# Altium PCB drin.PcbDoc
Units mm, origin at the board's own origin, x right, y up, seen from the top; angles counter-clockwise.
Board outline 36.09 x 67.31 mm, 2 copper layers (Top Layer, Bottom Layer); 39 components, 17 nets, 76 pads, 0 vias.
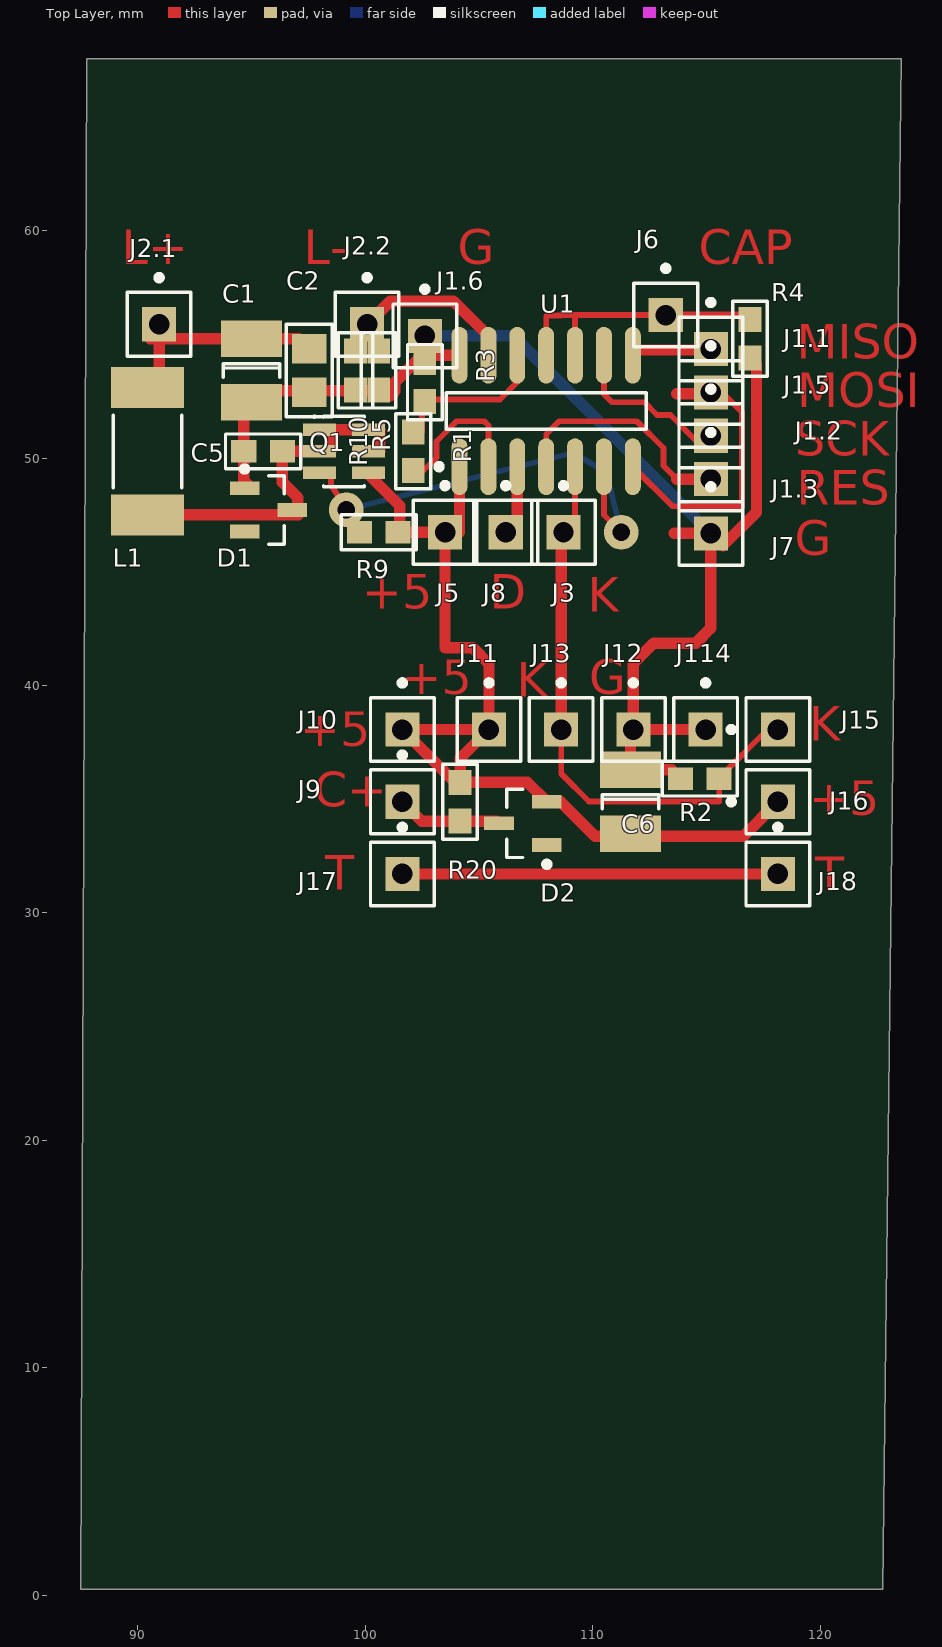
[diagram p0: Top Layer view]
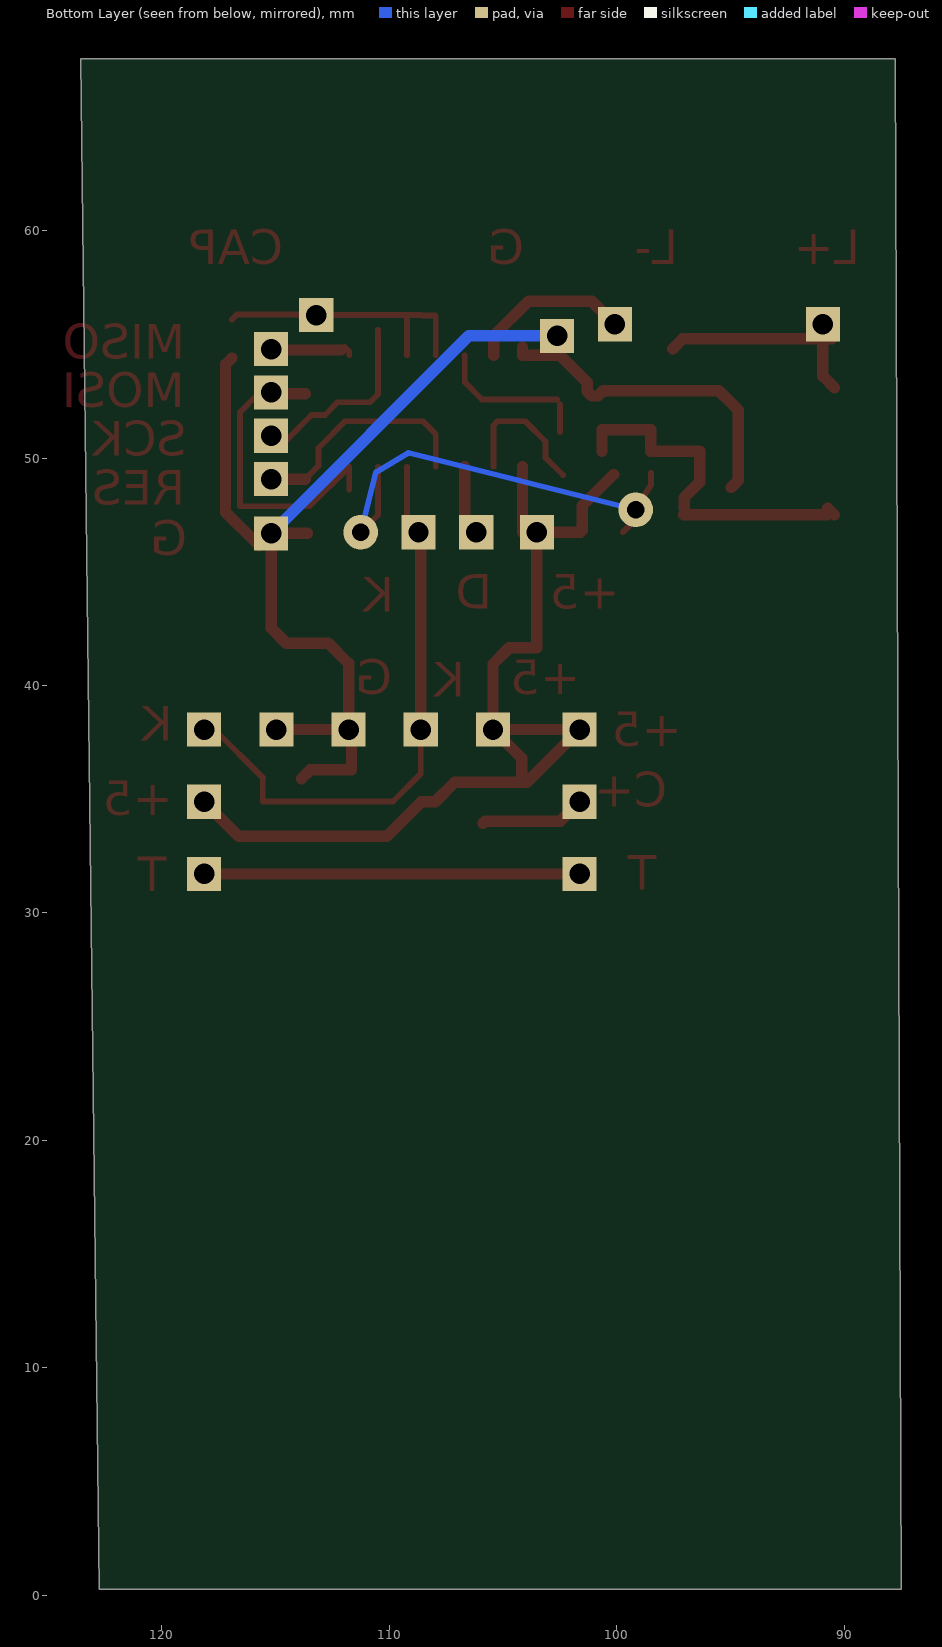
[diagram p1: Bottom Layer view, seen from below]

## Layer stack, top to bottom
Top Layer: signal copper 0.0356
Dielectric: dielectric 0.32, FR-4, Dk 4.8
Bottom Layer: signal copper 0.0356

## Board outline
87.478,0.254 87.757,67.564 123.571,67.564 122.758,0.254

## Design rules (kind name [scope] priority, off if disabled: settings)
Clearance [All] p1: gap=0.254
PolygonConnect [All] p1: connectstyle=Relief reliefconductorwidth=0.254 reliefentries=4 polygonreliefangle="90 Angle"
RoomDefinition drin [InComponentClass('drin')] p1: confinementstyle=ConfineIn formatcopy=TRUE lockcomponents=FALSE outline 13.716,89.916 27.432,89.916 27.432,103.124 13.716,103.124
RoutingVias [All] p1: holewidth=0.711 width=1.27 viastyle="Through Hole" minholewidth=0.711 minwidth=1.27 maxholewidth=0.711 maxwidth=1.27
SilkscreenOverComponentPads [All] p1: minsilkscreentomaskgap=0.254
SolderMaskExpansion [All] p1: expansion=0.102
TestPointUsage [All] p1: valid=0 allowmultiple=FALSE
Testpoint [All] p1: side=15 testpointundercomponent=TRUE minsize=1.016 maxsize=2.54 preferedsize=1.524 minholesize=0 maxholesize=1.016 preferedholesize=0.813 testpointgrid=0.025 style=1023 order=0123456789
Width [All] p1: maxlimit=2 minlimit=0.254 preferedwidth=0.5
23 further rules are at their usual default settings.

## Components (designator, comment, footprint, x,y, rotation, side; value= is the part's Value field where it differs from the comment)
C1 "100uF" C1210 94.996,53.848 r270 top
C2 "100pF" 2012[0805]A 97.536,53.848 r270 top
C5 "100pF" 1608[0603]A 95.504,50.292 r0 top
C6 "100uF" C1210 111.658,34.888 r270 top
D1 "BAT54C" SOT23_N 95.741,47.716 r0 top
D2 "BAT54C" SOT23_N 106.925,33.938 r180 top
J1.1 "MISO" PIN1 115.189,54.788 r0 top
J1.2 "SCK" PIN1 115.189,50.978 r0 top
J1.3 "RESET" PIN1 115.189,49.073 r0 top
J1.5 "MOSI" PIN1 115.189,52.883 r0 top
J1.6 "CND" PIN1 102.616,55.372 r0 top
J2.1 "LED+" PIN1 90.932,55.88 r0 top
J2.2 "LED-" PIN1 100.076,55.88 r0 top
J3 "KEY" PIN1 108.712,46.736 r0 top
J5 "+5" PIN1 103.505,46.736 r0 top
J6 "test_cap" PIN1 113.208,56.286 r0 top
J7 "CND" PIN1 115.189,46.685 r0 top
J8 "DEBUG" PIN1 106.172,46.736 r0 top
J9 "C+" PIN1 101.625,34.888 r0 top
J10 "+5" PIN1 101.625,38.063 r0 top
J11 "+5" PIN1 105.435,38.063 r0 top
J12 "CND" PIN1 111.785,38.063 r0 top
J13 "KEY" PIN1 108.61,38.063 r0 top
J15 "KEY" PIN1 118.135,38.063 r90 top
J16 "+5" PIN1 118.135,34.888 r90 top
J17 "trans" PIN1 101.625,31.713 r0 top
J18 "trans" PIN1 118.135,31.713 r0 top
J114 "CND" PIN1 114.96,38.063 r0 top
L1 "Inductor" 6332[2512] 90.424,50.292 r270 top
Q1 "IRLMS6702" Micro6 99.06,50.292 r270 top
R1 "18K" 1608[0603]A 102.108,50.292 r270 top
R2 "10K" 1608[0603]A 114.706,35.904 r0 top
R3 "1K8" 1608[0603]A 102.616,53.34 r270 top
R4 "10M" 1608[0603]A 116.916,55.245 r90 top
R5 "1" 1608[0603]A 100.584,53.848 r90 top
R9 "10K" 1608[0603]A 100.584,46.736 r180 top
R10 "1" 1608[0603]A 99.568,53.848 r90 top
R20 "1K" 1608[0603]A 104.165,34.888 r90 top
U1 "ATtiny24" SOIC14_M 107.95,52.07 r90 top

## Footprints (in the part's own frame and the unit in brackets; to place one, negate y for a bottom-side part, rotate by r counter-clockwise, add the part's x,y. Pads: shape width x height; smd on the part's side, far side on the other; paste and mask are expansions set on the pad)
1608[0603]A [mm] "Chip Capacitor; Body 1.6 x 0.8 mm (LxW typ)"
  rect 1.1x1 smd: 1(-0.85,0) 2(0.85,0)
  silkscreen extent -1.65,-0.76 1.65,0.76
2012[0805]A [mm] "Chip Resistor; Body 2.0 x 1.3 mm (LxW typ)"
  rect 1.3x1.5 smd: 1(-0.95,0) 2(0.95,0)
  silkscreen extent -2.03,-1.02 2.03,1.02
6332[2512] [mm] "Chip Resistor; Body 6.3 x 3.2 mm (LxW typ)"
  rect 1.8x3.2 smd: 1(-2.8,0) 2(2.8,0)
  silkscreen extent -1.6,-1.5 1.6,1.5
C1210 [mm] "Chip Capacitor; Body 3.2 x 2.5 mm (LxW typ)"
  rect 1.6x2.7 smd: 1(-1.4,0) 2(1.4,0)
  silkscreen extent -0.3,-1.25 0.3,1.25
Micro6 [mm] "SOT-457/SC-74; 6 Leads; Body 3 x 3 mm, inc. leads (LxW max)"
  rect 0.55x1.45 smd: 1(-0.95,-1.075) 2(0,-1.075) 3(0.95,-1.075) 4(0.95,1.075) 5(0,1.075) 6(-0.95,1.075)
  silkscreen extent -1.57,-1.35 1.55,0.9
PIN1 [mm] "Connector; Plug"
  rect 1.5x1.5 hole 0.9: 1(0,0)
  silkscreen extent -1.4,-1.4 1.4,2.17
SOIC14_M [mm] "14-Pin Small Outline Integrated Circuit 1.27 mm Pitch, IPC Low Density"
  oval 2.5x0.7 smd: 1(-2.45,3.81) 2(-2.45,2.54) 3(-2.45,1.27) 4(-2.45,0) 5(-2.45,-1.27) 6(-2.45,-2.54) 7(-2.45,-3.81) 8(2.45,-3.81) 9(2.45,-2.54) 10(2.45,-1.27) 11(2.45,0) 12(2.45,1.27) 13(2.45,2.54) 14(2.45,3.81)
  silkscreen extent -2.57,-4.4 0.8,4.83, body extent -2,-4.38 2,4.38, height 1.75
SOT23_N [mm] "SOT23, 3-Leads, Body 2.9x1.3mm, Pitch 0.95mm, Lead Span 2.3mm, IPC Medium Density"
  rect 1.3x0.6 smd: 1(-1.05,0.95) 2(-1.05,-0.95) 3(1.05,0)
  silkscreen extent -1.17,-1.5 0.7,1.92, body extent -0.7,-1.5 0.7,1.5, height 1.1

## Part data
C1 C2 C5 C6: library part "Cap Semi", "Capacitor (Semiconductor SIM Model)"
D1 D2: "Schottky Barrier Double Diode"
J1.1 J1.2 J1.3 J1.5 J1.6 J2.1 J2.2 J3 J5 J6 J7 J8 J9 J10 J11 J12 J13 J15 J16 J17 J18 J114: library part Socket, "Socket"
Q1: "HEXFET Power MOSFET"
R1 R2 R3 R4 R5 R9 R10 R20: library part "Res Semi", "Semiconductor Resistor"
U1: "8-Bit AVR Microcontroller with 1K Byte of Flash Memory"

## Free pads (board coordinates)
  round 1.524 hole 0.762: 0(111.252,46.736) 1(99.162,47.727)

## Nets (pads, with @x,y where several pads share a name; then routed paths per layer and width w, separated by ;. In a path a pad name is that pad's centre, name@x,y a point inside that pad or via, vN(x,y) a via of type N, cw(c..) or ccw(c..) an arc to the next point about the centre after c; other vN are vias at no path point)
ADC0: J2.2.1 R5.2 R10.2 U1.13 | length 7.2
  Top Layer w0.5: J2.2.1 101.092,56.896 103.872,56.896 105.41,55.358 U1.13
C+: D2.3 J9.1 R20.1 | length 4.6
  Top Layer w0.5: J9.1 102.475,34.038 R20.1 105.775,34.038 D2.3
CAP: J6.1 R4.2 U1.10 U1.11 | length 13.2
  Top Layer w0.254: U1.11 107.95,56.236 107.975,56.261 108.585,56.261 108.61,56.286 109.195,56.286 ; U1.10 109.22,56.261 109.195,56.286 ; J6.1@113.462,55.982 113.487,56.007 J6.1@113.767,56.286 ; 113.97,56.286 J6.1@113.767,56.286 ; R4.2 116.699,56.312 113.792,56.312 J6.1@113.767,56.286 ; 109.195,56.286 J6.1 J6.1@113.767,56.286
DEBUG: J8.1 U1.3 | length 3.5
  Top Layer w0.5: J8.1@106.045,46.355 106.299,46.609 106.68,46.99 U1.3
GND: C1.2 C2.2 C5.1 C6.1 D1.1 J1.6.1 J7.1 J12.1 J114.1 R2.1 R3.1 R4.1 R5.1 R10.1 U1.14 | length 61
  Top Layer w0.5: D1.1@94.962,48.702 94.844,48.82 94.654,49.01 C5.1 94.654,52.106 C1.2 95.507,52.959 97.536,52.959 99.568,52.959 100.584,52.959 100.593,52.959 100.823,52.729 101.092,52.729 101.295,52.932 101.295,52.998 101.295,53.315 102.393,54.413 102.501,54.52 102.616,54.52 U1.14 U1.14@104.14,54.864 ; J12.1@112,37.848 J12.1 ; 113.589,46.685 J7.1 115.189,42.52 114.529,41.859 112.674,41.859 111.785,40.97 J12.1 ; R2.1 113.472,36.288 C6.1 111.658,37.936 J12.1 ; J114.1 J12.1 ; J7.1@115.726,46.148 117.196,47.618 117.196,54.116 R4.1
  Bottom Layer w0.5: J1.6.1@103.124,54.864 J1.6.1 106.502,55.372 J7.1
KEY: J3.1 J13.1 J15.1 R2.2 U1.5 | length 26.8
  Top Layer w0.254: J3.1@108.585,46.355 108.839,46.609 109.22,46.99 U1.5 ; J13.1@108.61,37.428 J13.1 108.61,36.119 109.83,34.9 115.545,34.9 115.556,34.911 R2.2 ; R2.2@115.538,35.922 117.678,38.063 J15.1
  Top Layer w0.5: J13.1 108.61,46.634 J3.1
LED+: C1.1 C2.1 J2.1.1 L1.1 | length 11.1
  Top Layer w0.5: L1.1 90.932,53.6 J2.1.1 90.424,55.372 90.548,55.248 90.932,55.248 C1.1 97.086,55.248 C2.1
MISO: J1.1.1 U1.8 | length 3.9
  Top Layer w0.254: U1.8 111.76,54.673 U1.8@111.976,54.889 ; J1.1.1@114.618,54.749 114.884,54.483 115.189,54.178 J1.1.1@115.291,54.178
  Top Layer w0.5: 112.116,54.749 J1.1.1@114.618,54.749
MOSI: J1.5.1 U1.7 | length 13.9
  Top Layer w0.254: U1.7@111.76,48.616 U1.7 113.501,47.879 116.565,47.879 116.565,52.015 115.748,52.832 J1.5.1@115.189,52.832
  Top Layer w0.5: 113.69,52.832 J1.5.1@115.189,52.832
NetC5_2: C5.2 D1.3 L1.2 Q1.1 Q1.2 Q1.5 Q1.6 | length 15.7
  Top Layer w0.5: L1.2 L1.2@90.718,47.786 ; L1.2@90.743,47.498 96.791,47.498 D1.3@97.053,47.498 ; D1.3@97.028,47.786 97.028,48.26 96.354,48.934 C5.2 Q1.2 98.493,50.292 98.493,51.242 Q1.6 100.643,51.242 Q1.5@100.643,50.292
NetQ1_3: pad.0 pad.1 Q1.3 R9.2 U1.6 | length 21
  Top Layer w0.254: Q1.3@98.493,49.342 98.493,48.827 pad.1 99.06,47.41 R9.2 ; U1.6 110.49,47.498 pad.0
  Bottom Layer w0.254: pad.1 109.16,50.226 110.595,49.366 pad.0
NetR1_1: R1.1 R3.2 U1.12 | length 6.8
  Top Layer w0.254: R1.1@102.489,51.142 R3.2@102.489,52.363 ; R3.2@102.616,52.578 105.918,52.578 106.68,53.34 U1.12
NetR1_2: R1.2 U1.2 | length 6.3
  Top Layer w0.254: R1.2@102.362,49.251 103.124,50.013 103.124,50.724 104.013,51.613 105.232,51.613 105.41,51.435 U1.2
RESET: J1.3.1 U1.4 | length 10.5
  Top Layer w0.254: U1.4 107.95,51.054 108.509,51.613 111.938,51.613 113.106,50.444 113.106,49.657 113.69,49.073 ; J1.3.1 J1.3.1@115.291,49.073
  Top Layer w0.5: 113.69,49.073 J1.3.1
SCK: J1.2.1 U1.9 | length 8.5
  Top Layer w0.254: U1.9@110.49,55.626 U1.9 110.49,52.807 110.846,52.451 112.268,52.451 112.827,51.892 113.411,51.892 114.529,50.775 115.189,50.775 J1.2.1@115.291,50.775
TRANS: J17.1 J18.1 | length 16.5
  Top Layer w0.5: J17.1 J18.1
VCC: C6.2 D2.2 J5.1 J10.1 J11.1 J16.1 Q1.4 R9.1 R20.2 U1.1 | length 43.9
  Top Layer w0.5: Q1.4@100.135,49.276 101.517,47.894 101.517,46.819 101.6,46.736 J5.1 103.505,41.656 104.724,41.656 105.435,40.945 J11.1 ; J5.1@104.14,46.736 U1.1 ; J16.1 116.611,33.364 111.658,33.364 110.109,33.364 108.585,34.888 D2.2 107.125,35.738 R20.2 ; R20.2 104.165,36.793 J11.1 ; R20.2 103.95,35.738 J10.1 J11.1
pads on no net: D1.2 D2.1

## Other copper
Top Layer:
  text "L+" at 89.281,58.522 h1.52
  text "L-" at 97.282,58.522 h1.52
  text "G" at 104.064,58.522 h1.52
  text "CAP" at 114.656,58.522 h1.52
  text "MISO" at 118.974,54.356 h1.52
  text "MOSI" at 118.999,52.222 h1.52
  text "SCK" at 118.897,50.089 h1.52
  text "RES" at 118.974,47.955 h1.52
  text "G" at 118.872,45.72 h1.52
  text "+5" at 99.873,43.383 h1.52
  text "D" at 105.461,43.383 h1.52
  text "K" at 109.779,43.231 h1.52
  text "+5" at 101.6,39.624 h1.52
  text "G" at 109.855,39.624 h1.52
  text "K" at 106.655,39.497 h1.52
  text "K" at 119.507,37.567 h1.52
  text "+5" at 97.13,37.338 h1.52
  text "C+" at 97.765,34.671 h1.52
  text "+5" at 119.507,34.29 h1.52
  text "T" at 98.247,31.013 h1.52
  text "T" at 119.786,30.963 h1.52